# Altium PCB ResistenciasGRANDE.PcbDoc
Units mm, origin at the board's own origin, x right, y up, seen from the top; angles counter-clockwise.
Board outline 40.4 x 153.2 mm, 2 copper layers (Top Layer, Bottom Layer); 36 components, 54 nets, 116 pads, 0 vias.
Unrouted connection lines stored in the file: 2.
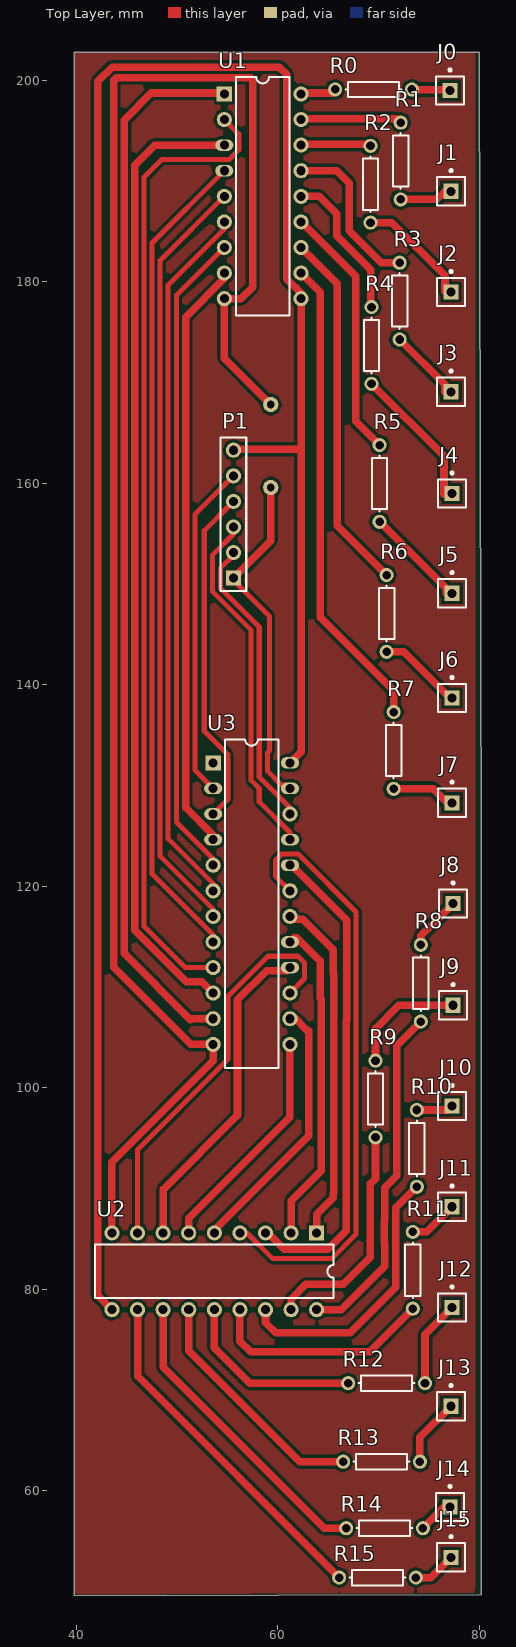
[diagram p0: Top Layer view]
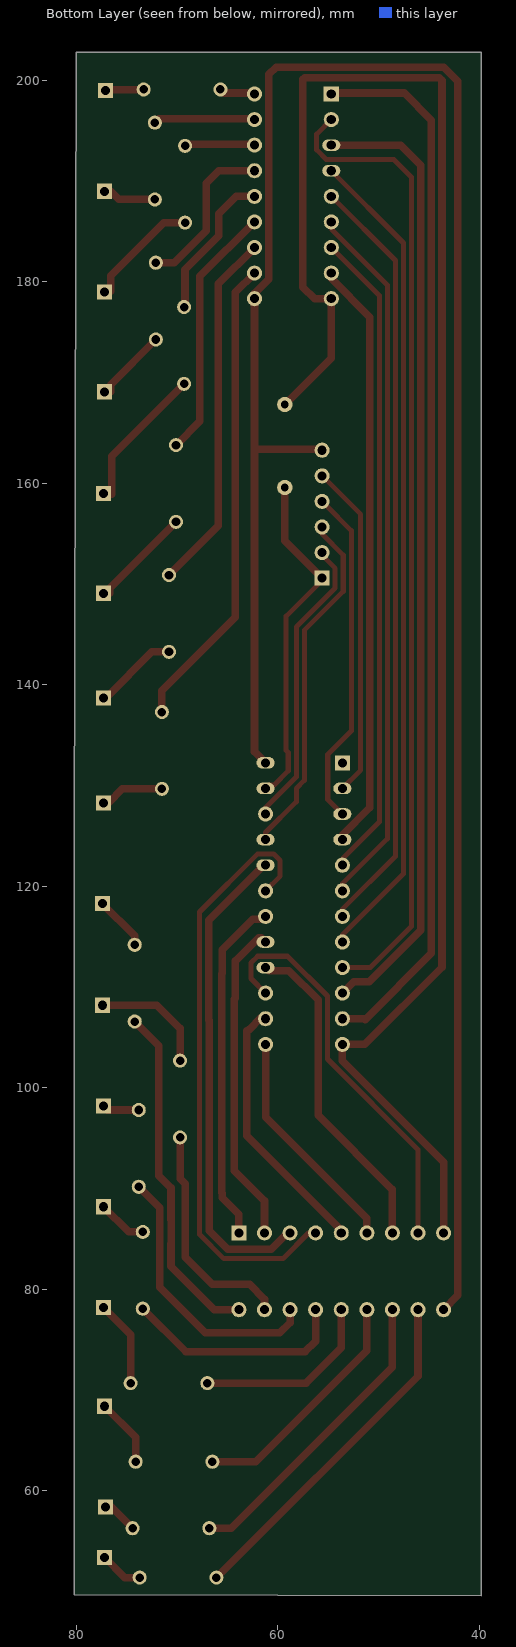
[diagram p1: Bottom Layer view, seen from below]

## Layer stack, top to bottom
Top Solder: solder mask 0.0102, Solder Resist, Dk 3.5
Top Layer: signal copper 0.0356
Dielectric 1: dielectric 0.32, FR-4, Dk 4.8
Bottom Layer: signal copper 0.0356
Bottom Solder: solder mask 0.0102, Solder Resist, Dk 3.5

## Board outline
39.8,49.6 80.2,49.7 80.2,124.1 80,202.8 39.8,202.8

## Design rules (kind name [scope] priority, off if disabled: settings)
Clearance [All] p1: gap=0.3
PolygonConnect [All] p1: connectstyle=Relief reliefconductorwidth=0.254 reliefentries=4 polygonreliefangle="90 Angle" airgapwidth=0.254
RoutingVias [All] p1: holewidth=0.711 width=1.27 viastyle="Through Hole" minholewidth=0.711 minwidth=1.27 maxholewidth=0.711 maxwidth=1.27
SolderMaskExpansion [All] p1: expansion=0.102
Width [All] p1: maxlimit=1 minlimit=0.25 preferedwidth=0.75
29 further rules are at their usual default settings.

## Components (designator, comment, footprint, x,y, rotation, side; value= is the part's Value field where it differs from the comment)
J0 "Socket" PIN1 77.1,199 r0 top
J1 "Socket" PIN1 77.2,189 r0 top
J2 "Socket" PIN1 77.2,179 r0 top
J3 "Socket" PIN1 77.2,169.1 r0 top
J4 "Socket" PIN1 77.3,159 r0 top
J5 "Socket" PIN1 77.3,149.1 r0 top
J6 "Socket" PIN1 77.3,138.7 r0 top
J7 "Socket" PIN1 77.3,128.3 r0 top
J8 "Socket" PIN1 77.4,118.3 r0 top
J9 "Socket" PIN1 77.4,108.21 r0 top
J10 "Socket" PIN1 77.3,98.21 r0 top
J11 "Socket" PIN1 77.3,88.21 r0 top
J12 "Socket" PIN1 77.3,78.21 r0 top
J13 "Socket" PIN1 77.2,68.41 r0 top
J14 "Socket" PIN1 77.1,58.41 r0 top
J15 "Socket" PIN1 77.2,53.41 r0 top
P1 "Header 6" HDR1X6 55.6,150.6 r90 top
R0 "Res1" AXIAL-0.3 69.5,199.11 r0 top
R1 "Res1" AXIAL-0.3 72.2,192 r270 top
R2 "Res2" AXIAL-0.3 69.2,189.7 r270 top
R3 "Res1" AXIAL-0.3 72.1,178.1 r270 top
R4 "Res1" AXIAL-0.3 69.3,173.7 r270 top
R5 "Res1" AXIAL-0.3 70.1,160 r270 top
R6 "Res1" AXIAL-0.3 70.8,147.1 r270 top
R7 "Res1" AXIAL-0.3 71.5,133.5 r270 top
R8 "Res1" AXIAL-0.3 74.2,110.4 r90 top
R9 "Res1" AXIAL-0.3 69.7,98.9 r90 top
R10 "Res1" AXIAL-0.3 73.8,94 r90 top
R11 "Res1" AXIAL-0.3 73.4,81.9 r90 top
R12 "Res1" AXIAL-0.3 70.8,70.7 r0 top
R13 "Res1" AXIAL-0.3 70.3,62.9 r0 top
R14 "Res1" AXIAL-0.3 70.6,56.3 r0 top
R15 "Res1" AXIAL-0.3 69.9,51.4 r0 top
U1 "ULN2803A" 707-02#1 58.5,188.5 r270 top
U2 "ULN2803A" 707-02#2 53.7,81.8 r180 top
U3 "SN74HC4514NT" NT024 57.4,118.3 r270 top

## Footprints (in the part's own frame and the unit in brackets; to place one, negate y for a bottom-side part, rotate by r counter-clockwise, add the part's x,y. Pads: shape width x height; smd on the part's side, far side on the other; paste and mask are expansions set on the pad)
707-02#1 [mm] "DIP; 18 Leads; Row Spacing 7.62 mm; Pitch 2.54 mm"
  rect 1.5x1.5 hole 0.9: 1(-10.16,-3.81)
  round 1.5 hole 0.9: 2(-7.62,-3.81) 5(0,-3.81) 6(2.54,-3.81) 7(5.08,-3.81) 8(7.62,-3.81) 9(10.16,-3.81) 10(10.16,3.81) 11(7.62,3.81) 12(5.08,3.81) 13(2.54,3.81) 14(0,3.81) 15(-2.54,3.81) 16(-5.08,3.81) 17(-7.62,3.81) 18(-10.16,3.81)
  oval 1.15x1.8 hole 0.9: 3(-5.08,-3.81) 4(-2.54,-3.81)
  silkscreen extent -11.85,-2.65 11.85,2.65
707-02#2 [mm] "DIP; 18 Leads; Row Spacing 7.62 mm; Pitch 2.54 mm"
  rect 1.5x1.5 hole 0.9: 1(-10.16,-3.81)
  round 1.5 hole 0.9: 2(-7.62,-3.81) 3(-5.08,-3.81) 4(-2.54,-3.81) 5(0,-3.81) 6(2.54,-3.81) 7(5.08,-3.81) 8(7.62,-3.81) 9(10.16,-3.81) 10(10.16,3.81) 11(7.62,3.81) 12(5.08,3.81) 13(2.54,3.81) 14(0,3.81) 15(-2.54,3.81) 16(-5.08,3.81) 17(-7.62,3.81) 18(-10.16,3.81)
  silkscreen extent -11.85,-2.65 11.85,2.65
AXIAL-0.3 [mm] "Axial Device, Thru-Hole; 2 Leads; 0.3 in Pin Spacing"
  round 1.4 hole 0.85: 1(-3.81,0) 2(3.81,0)
  silkscreen extent -2.77,-0.76 2.77,0.76
HDR1X6 [mm] "Connector; Header; 6 Position"
  rect 1.5x1.5 hole 0.9: 1(0,0)
  round 1.5 hole 0.9: 2(2.54,0) 3(5.08,0) 4(7.62,0) 5(10.16,0) 6(12.7,0)
  silkscreen extent -1.27,-1.27 13.97,1.27
NT024 [mm] "DIP; 24 Leads; Row Spacing 7.62 mm; Pitch 2.54 mm"
  rect 1.5x1.5 hole 0.9: 1(-13.97,-3.81)
  oval 1.15x1.8 hole 0.9 paste+0: 2(-11.43,-3.81)
  oval 1.15x1.8 hole 0.9: 3(-8.89,-3.81) 4(-6.35,-3.81) 16(6.35,3.81) 17(3.81,3.81) 20(-3.81,3.81) 21(-6.35,3.81) 23(-11.43,3.81) 24(-13.97,3.81)
  round 1.5 hole 0.9: 5(-3.81,-3.81) 6(-1.27,-3.81) 7(1.27,-3.81) 8(3.81,-3.81) 9(6.35,-3.81) 10(8.89,-3.81) 11(11.43,-3.81) 12(13.97,-3.81) 13(13.97,3.81) 14(11.43,3.81) 15(8.89,3.81) 18(1.27,3.81) 19(-1.27,3.81) 22(-8.89,3.81)
  silkscreen extent -16.3,-2.65 16.3,2.65
PIN1 [mm] "Connector; Plug"
  rect 1.5x1.5 hole 0.9: 1(0,0)
  silkscreen extent -1.4,-1.4 1.4,2.17

## Part data
P1: "Header, 6-Pin"
R0 R1 R3 R4 R5 R6 R7 R8 R9 R10 R11 R12 R13 R14 R15: "Resistor"
R2: library part Res1, "Resistor"
U1 U2: "Octal Peripheral Driver Array"
U3: "4-Line to 16-Line Decoder / Demultiplexer with Address Latches"

## Free pads (board coordinates)
  round 1.524 hole 0.762: 0(59.3,159.6) 1(59.3,167.837)

## Nets (pads, with @x,y where several pads share a name; then routed paths per layer and width w, separated by ;. In a path a pad name is that pad's centre, name@x,y a point inside that pad or via, vN(x,y) a via of type N, cw(c..) or ccw(c..) an arc to the next point about the centre after c; other vN are vias at no path point)
NetJ0_1: J0.1 R0.2 | length 3.3
  Top Layer w0.75: R0.2 73.32,199.1 J0.1@76.6,199.1
NetJ1_1: J1.1 R1.2 | length 4.7
  Top Layer w0.75: R1.2 75.79,188.19 J1.1@76.6,189
NetJ2_1: J2.1 R2.2 | length 11.1
  Top Layer w0.75: R2.2 71.31,185.89 76.6,180.6 J2.1@76.6,179.1
NetJ3_1: J3.1 R3.2 | length 7.1
  Top Layer w0.75: R3.2 76.6,169.79 J3.1@76.6,169.1
NetJ4_1: J4.1 R4.2 | length 14
  Top Layer w0.75: R4.2 76.5,162.69 76.5,158.91
NetJ5_1: J5.1 R5.2 | length 9.8
  Top Layer w0.75: R5.2 76.7,149.59 J5.1@76.7,149.1
NetJ6_1: J6.1 R6.2 | length 8.1
  Top Layer w0.75: R6.2 72.51,143.29 J6.1@77,138.8
NetJ7_1: J7.1 R7.2 | length 5.9
  Top Layer w0.75: R7.2 75.42,129.69 J7.1@76.8,128.31
NetJ8_1: J8.1 R8.2 | length 5.4
  Top Layer w0.75: R8.2 74.2,115.1 J8.1
NetJ9_1: J9.1 R9.2 | length 11.8
  Top Layer w0.75: R9.2 69.7,105.9 72.01,108.21 J9.1
NetJ10_1: J10.1 R10.2 | length 3.7
  Top Layer w0.75: R10.2 76.9,97.81 J10.1
NetJ11_1: J11.1 R11.2 | length 4.9
  Top Layer w0.75: R11.2 74.8,85.71 J11.1
NetJ12_1: J12.1 R12.2 | length 8.6
  Top Layer w0.75: R12.2 74.61,75.52 J12.1
NetJ13_1: J13.1 R13.2 | length 6.8
  Top Layer w0.75: R13.2 74.11,65.32 J13.1
NetJ14_1: J14.1 R14.2 | length 3.6
  Top Layer w0.75: R14.2 76.52,58.41 J14.1
NetJ15_1: J15.1 R15.2 | length 4.3
  Top Layer w0.75: R15.2 75.19,51.4 J15.1
NetP1_1: P1.1 pad.0 pad.1 U1.9 U2.9 U3.1 U3.12 U3.23 | length 208
  Top Layer w0.5: P1.1@55.3,150.7 59.17,146.83 59.17,133.487 58.96,133.277 58.96,131.473 60.378,130.055 60.885,130.055 U3.23
  Top Layer w0.75: U2.9 43.54,92.64 53.59,102.69 U3.12 51.37,104.33 43.7,112 43.7,200 43.985,200.285 57.315,200.285 57.5,200.1 57.5,179.5 56.34,178.34 U1.9 54.69,172.447 pad.1 ; P1.1 59.3,154.3 pad.0@59.3,158.963
NetP1_2: P1.2 U3.22 | length 29.4
  Top Layer w0.5: P1.2 55.6,152.878 54.3,151.578 54.3,149.622 58.16,145.762 58.16,130.864 61.21,127.814 U3.22
NetP1_3: P1.3 U3.21 | length 35.1
  Top Layer w0.5: P1.3 55.6,154.978 53.5,152.878 53.5,149.291 57.36,145.431 57.36,130.533 58.16,129.733 58.16,128.402 61.21,125.352 U3.21
NetP1_4: P1.4 U3.3 | length 34.2
  Top Layer w0.5: U3.3 55.04,128.64 55.04,133.098 52.7,135.438 52.7,155.32 P1.4@55.3,157.92 ; P1.4@55.3,158.32 P1.4@55.3,157.92 ; P1.4 P1.4@55.3,157.92
NetP1_5: P1.5 U3.2 | length 33.5
  Top Layer w0.5: U3.2 51.775,131.545 51.775,156.935 P1.5
  Top Layer w0.75: U3.2 U3.2@53.59,129.815
NetP1_6: P1.6 U1.10 U2.10 U3.24 | length 218.6
  Top Layer w0.75: U2.10 42.115,79.415 42.115,199.9 43.55,201.335 60.165,201.335 60.885,200.615 60.885,180.29 62.31,178.865 U1.10 62.31,163.4 ; P1.6@55.3,163.4 62.31,163.4 ; U3.24 62.31,133.37 62.31,163.4
NetR0_1: R0.1 U1.18 | length 3.5
  Top Layer w0.75: U1.18@62.31,198.76 65.34,198.76 R0.1
NetR1_1: R1.1 U1.17 | length 10.3
  Top Layer w0.75: U1.17@62.1,196.22 71.79,196.22 R1.1
NetR2_1: R2.1 U1.16 | length 6.8
  Top Layer w0.75: U1.16@62.5,193.68 69.03,193.68 R2.1
NetR3_1: R3.1 U1.15 | length 16.3
  Top Layer w0.75: U1.15 65.86,191.04 67.1,189.8 67.1,185.1 70.29,181.91 R3.1
NetR4_1: R4.1 U1.14 | length 14.9
  Top Layer w0.75: U1.14 64.1,188.5 65.85,186.75 65.85,184.582 69.21,181.222 69.21,177.6 R4.1
NetR5_1: R5.1 U1.13 | length 25.4
  Top Layer w0.75: U1.13 67.725,180.545 67.725,166.185 R5.1
NetR6_1: R6.1 U1.12 | length 36
  Top Layer w0.75: U1.12 65.9,179.83 65.9,155.81 R6.1
NetR7_1: R7.1 U1.11 | length 47.4
  Top Layer w0.75: U1.11 64.2,178.99 64.2,146.74 71.5,139.44 R7.1
NetR8_1: R8.1 U2.18 | length 34.3
  Top Layer w0.75: U2.18 66.29,77.99 70.6,82.3 70.6,84.515 70.575,84.54 70.575,86.88 70.6,86.905 70.6,90.108 71.8,91.308 71.8,104.19 R8.1
NetR9_1: R9.1 U2.17 | length 22.7
  Top Layer w0.75: U2.17 61.32,79.02 62.8,80.5 66.5,80.5 69.2,83.2 69.2,90.476 69.7,90.976 R9.1
NetR10_1: R10.1 U2.16 | length 27.3
  Top Layer w0.75: U2.16 58.78,76.72 59.8,75.7 67.2,75.7 71.7,80.2 71.7,88.09 R10.1
NetR11_1: R11.1 U2.15 | length 22.5
  Top Layer w0.75: U2.15 56.24,74.86 57.3,73.8 69.11,73.8 R11.1
NetR12_1: R12.1 U2.14 | length 18.5
  Top Layer w0.75: U2.14 53.7,74.2 57.2,70.7 R12.1
NetR13_1: R13.1 U2.13 | length 24
  Top Layer w0.75: U2.13 51.16,73.94 62.2,62.9 R13.1
NetR14_1: R14.1 U2.12 | length 30.5
  Top Layer w0.75: U2.12 48.62,72.28 64.6,56.3 R14.1
NetR15_1: R15.1 U2.11 | length 34.9
  Top Layer w0.75: U2.11 46.08,71.41 R15.1
NetU1_1: U1.1 U3.11 | length 105.4
  Top Layer w0.75: 51.316,106.786 51.232,106.87 ; U3.11 51.232,106.87 ; U1.1 54.59,198.76 47.46,198.76 44.75,196.05 44.75,113.352 51.232,106.87
NetU1_2: U1.2 U3.9 | length 97.2
  Top Layer w0.5: U3.9 50.813,111.95 46.725,116.038 46.725,190.4 48.49,192.165 55.191,192.165 56.14,193.114 56.14,194.67 U1.2 U1.2@54.59,196.22
NetU1_3: U1.3 U3.10 | length 96
  Top Layer w0.75: U3.10 52.475,110.525 50.93,110.525 45.8,115.655 45.8,191.6 47.78,193.58 U1.3
NetU1_4: U1.4 U3.8 | length 82
  Top Layer w0.5: U3.8 53.59,115.192 47.525,121.257 47.525,183.875 U1.4
NetU1_5: U1.5 U3.7 | length 76.3
  Top Layer w0.5: U3.7 53.59,117.732 48.325,122.997 48.325,182.135 U1.5
NetU1_6: U1.6 U3.6 | length 70.5
  Top Layer w0.5: U3.6 53.59,120.272 49.125,124.737 49.125,179.693 54.69,185.258 U1.6
NetU1_7: U1.7 U3.5 | length 64.8
  Top Layer w0.5: U3.5 53.59,122.734 49.925,126.399 49.925,178.655 U1.7
NetU1_8: U1.8 U3.4 | length 59
  Top Layer w0.75: U3.4 53.59,125.097 50.85,127.837 50.85,176.515 54.69,180.355 U1.8
NetU2_1: U2.1 U3.18 | length 34.4
  Top Layer w0.75: U3.18@61.21,116.73 62.47,116.73 65.5,113.7 65.5,111.406 65.562,111.343 65.562,89.607 65.5,89.544 65.5,89.108 63.86,87.468 U2.1
NetU2_2: U2.2 U3.17 | length 32.4
  Top Layer w0.75: U3.17 61.62,114.9 61.9,114.9 64.2,112.6 64.2,108.9 64.309,108.791 64.309,91.8 61.32,88.811 U2.2
NetU2_3: U2.3 U3.20 | length 47.7
  Top Layer w0.75: U2.3 59.022,85.61 60.647,83.985 64.972,83.985 66.8,85.813 66.8,89.064 66.813,89.077 66.813,106.698 66.844,106.729 66.844,116.656 U3.20@61.6,121.9
NetU2_4: U2.4 U3.19 | length 59.9
  Top Layer w0.5: U2.4 56.942,85.61 59.492,83.06 65.356,83.06 67.769,85.473 67.769,117.467 62.001,123.235 60.419,123.235 59.76,122.576 59.76,121.02 U3.19
NetU2_5: U2.5 U3.14 | length 25.6
  Top Layer w0.75: U2.5 53.7,85.9 63.059,95.259 63.059,105.7 ; U3.14@61.669,106.97 62.839,105.8
NetU2_6: U2.6 U3.13 | length 22.6
  Top Layer w0.75: U2.6 51.16,87.06 61.2,97.1 U3.13@61.2,104.03
NetU2_7: U2.7 U3.16 | length 32.7
  Top Layer w0.75: U2.7 48.62,89.92 56,97.3 56,108.74 58.91,111.65 60.91,111.65 U3.16
NetU2_8: U2.8 U3.15 | length 40.8
  Top Layer w0.5: U2.8 46.08,93.872 55.075,102.867 55.075,109.123 59.027,113.075 62.001,113.075 62.66,112.416 62.66,110.86 U3.15 U3.15@60.91,109.11

## Polygon pours and split planes (outlines as drawn)
no net on Top Layer "Top Layer-No Net" (solid, pour order 12): 39.9,49.7 39.8,49.8 39.8,202.7 39.9,202.8 79.6,202.8 79.6,50.3 80,49.9